# Altium PCB PCB_Console.PcbDoc
Units mm, origin at the board's own origin, x right, y up, seen from the top; angles counter-clockwise.
Board outline 188.35 x 103.18 mm, 2 copper layers (Top Layer, Bottom Layer), stack 1.071 mm thick; 117 components, 85 nets, 404 pads, 0 vias.
Unrouted connection lines stored in the file: 269.
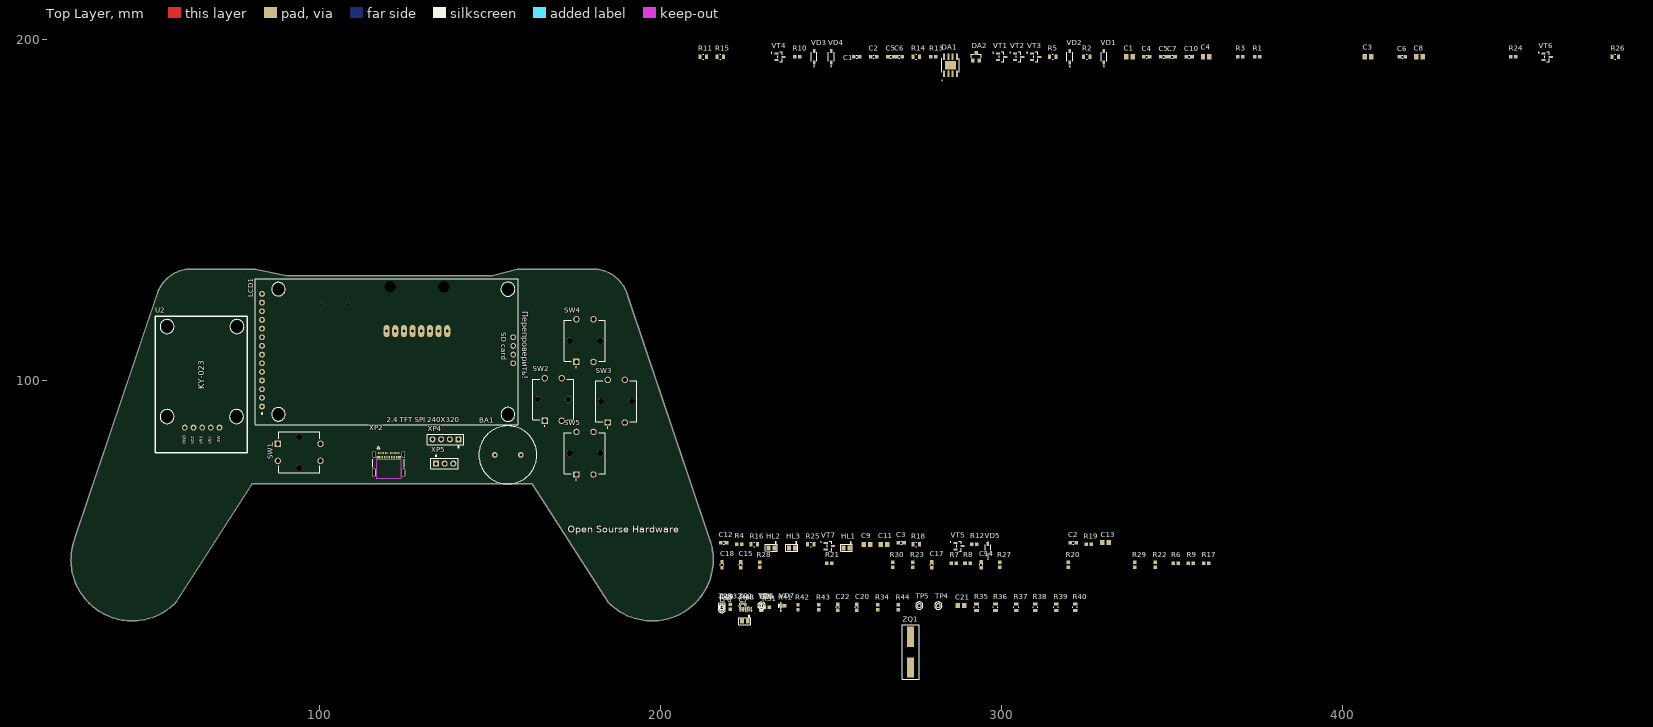
[diagram p0: Top Layer view]
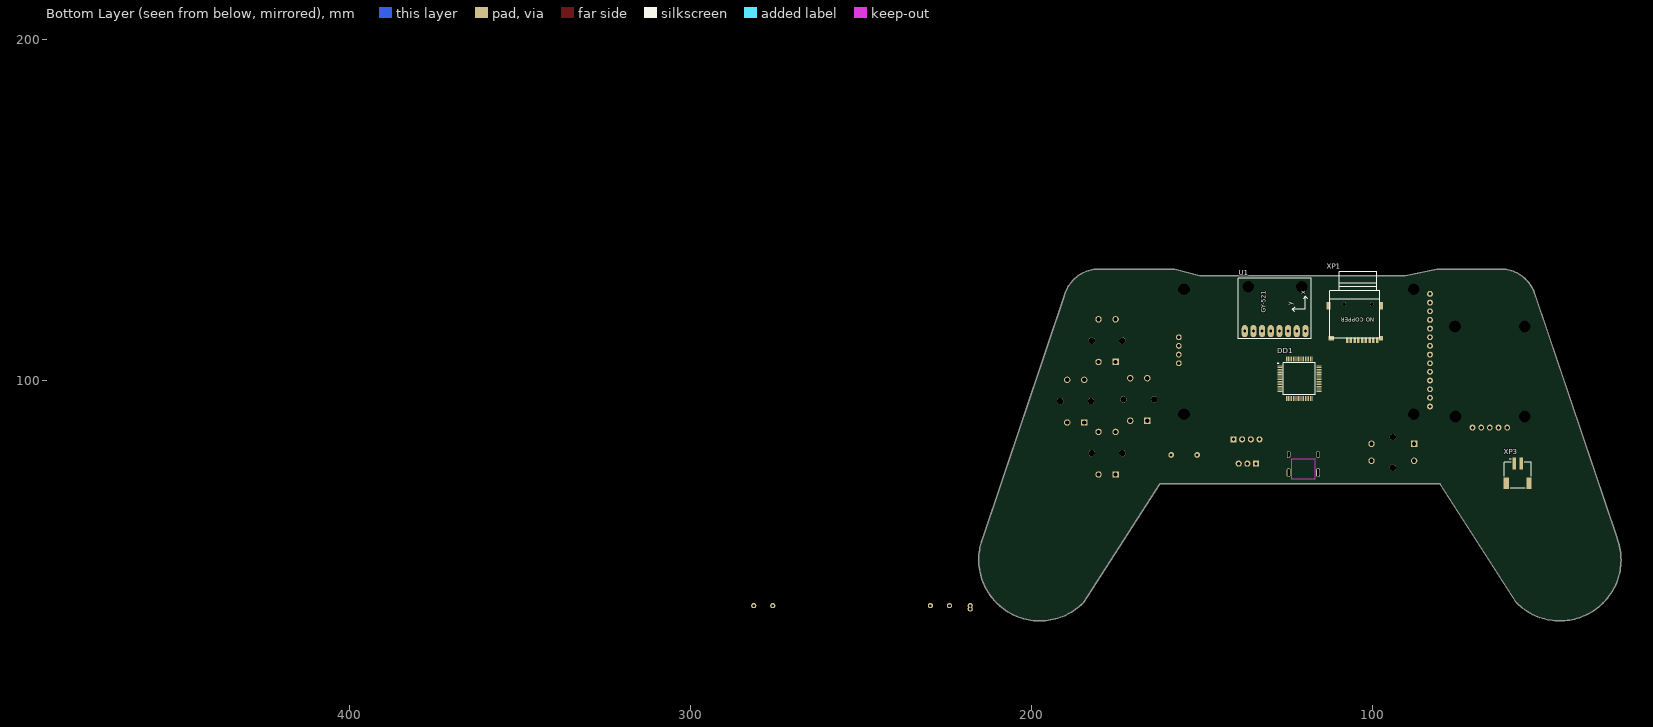
[diagram p1: Bottom Layer view, seen from below]

## Layer stack, top to bottom
Top Solder: solder mask 0.0102, Solder Resist, Dk 3.5
Top Layer: signal copper 0.0356
Dielectric 1: dielectric 1, FR-4, Dk 4.8
Bottom Layer: signal copper 0.0356
Bottom Solder: solder mask 0.0102, Solder Resist, Dk 3.5

## Board outline
57.711,34.865 80.137,69.75 162.363,69.75 184.789,34.865 ccw(c185,35) 184.823,34.823 ccw(c197.5,47.5) 215.428,47.5 ccw(c197.5,47.5) 214.288,53.791 190.344,124.822 ccw(c180.003,122.099) 181.075,132.739 ccw(c181,132.5) 181,132.75 158,132.75 ccw(c158,132.5) 157.934,132.742 150.633,130.75 90.368,130.75 81.052,132.74 ccw(c81,132.495) 81,132.745 61,132.745 ccw(c61,132.495) 60.811,132.659 ccw(c62.497,122.099) 52.156,124.822 28.212,53.791 ccw(c45,47.5) 57.677,34.823 ccw(c57.5,35)

## Design rules (kind name [scope] priority, off if disabled: settings)
Clearance [All] p1: gap=0.254 ignorepadtopadclearanceinfootprint=FALSE except(0: Arc-Hole Track-Hole SMDPad-Hole THPad-Hole Via-Hole Fill-Hole Poly-Hole Region-Hole Text-Hole)
Height [All] p1: minheight=0 maxheight=35 prefheight=12.7
PolygonConnect [All] p1: connectstyle=Relief reliefconductorwidth=0.254 reliefentries=4 polygonreliefangle="90 Angle" airgapwidth=0.254
RoutingVias [All] p1: holewidth=0.711 width=1.27 viastyle="Through Hole" minholewidth=0.711 minwidth=1.27 maxholewidth=0.711 maxwidth=1.27
SolderMaskExpansion [All] p1: expansion=0.102
Width [All] p1: maxlimit=0.254 minlimit=0.254 preferedwidth=0.254
29 further rules are at their usual default settings.

## Components (designator, comment, footprint, x,y, rotation, side; value= is the part's Value field where it differs from the comment)
BA1 "EMX-8T01P" EMX-8T01PCB 151.384,78.232 r0 top
C1 "1uF" CAPC2012X70 337.5,195 r0 top
C2 "0,1uF" CAPC1608X90 320.999,52.5 r0 top
C3 "0,1uF" CAPC1608X90 270.499,52.5 r0 top
C4 "0,1uF" CAPC1608X90 342.5,195 r0 top
C5 "0,1uF" CAPC1608X90 347.5,195 r0 top
C6 "0,1uF" CAPC1608X90 417.5,195 r0 top
C7 "0,1uF" CAPC1608X90 350,195 r0 top
C8 "1uF" CAPC2012X70 422.5,195 r0 top
C9 "20 pF" CAPC2012X70 260.499,52 r0 top
C10 "0,1uF" CAPC1608X90 355,195 r0 top
C11 "20 pF" CAPC2012X70 265.499,52 r0 top
C12 "0,1uF" CAPC1608X90 218.5,52.5 r0 top
C13 "1uF" CAPC2012X70 330.499,52.5 r0 top
C14 "0,1uF" CAPC1608X90 293.999,46 r90 top
C15 "0,1uF" CAPC1608X90 223.5,46 r90 top
C16 "0,1uF" CAPC1608X90 229.616,33.528 r90 top
C17 "0,1uF" CAPC1608X90 279.499,46 r90 top
C18 "0,1uF" CAPC1608X90 218,46 r90 top
C19 "0,1uF" CAPC1608X90 217.932,33.528 r90 top
C20 "0,1uF" CAPC1608X90 257.556,33.528 r90 top
C21 "1uF" CAPC2012X70 288.036,34.036 r0 top
C22 "0,1uF" CAPC1608X90 251.968,33.528 r90 top
DA1 "TP4056" SOP127P600X175-9N 285,192.5 r90 top
DA2 "XC6206P332MR-G" SOT-23 292.5,195 r0 top
DD1 "STM32F411RET6" QFP50P1200X1200X160-64N 121.412,100.584 r180 bottom
HL1 "FYLS-0805UBC" "0805 CHIP SMD LED" 254.499,51 r0 top
HL2 "FYLS-0805BUGC" "0805 CHIP SMD LED" 232.5,51 r0 top
HL3 "FYLS-0805URC" "0805 CHIP SMD LED" 238.5,51 r0 top
HL4 "FYLS-0805BUGC" "0805 Chip SMD LED" 224.677,29.464 r0 top
LCD1 "2.4' TFT SPI  ILI9341" "ILI9341 TFT DISPLAY" 83.09,125.45 r270 top locked
R1 "5.1К" RESC1607X60N 375,195 r0 top
R2 "0.51" 0805_RES 325,195 r0 top
R3 "5.1К" RESC1607X60N 370,195 r0 top
R4 "5.1К" RESC1607X60N 223,52 r0 top
R5 "0.51" 0805_RES 315,195 r0 top
R6 "1K" RESC1607X60N 350.999,46.5 r0 top
R7 "1K" RESC1607X60N 285.999,46.5 r0 top
R8 "1K" RESC1607X60N 289.999,46.5 r0 top
R9 "1K" RESC1607X60N 355.499,46.5 r0 top
R10 "5.1К" RESC1607X60N 240,195 r0 top
R11 "47 K" 0805_RES 212.5,195 r0 top
R12 "22" RESC1607X60N 291.999,52 r0 top
R13 "22" RESC1607X60N 280,195 r0 top
R14 "47 K" 0805_RES 275,195 r0 top
R15 "47 K" 0805_RES 217.5,195 r0 top
R16 "47 K" 0805_RES 227.5,52 r0 top
R17 "1K" RESC1607X60N 359.999,46.5 r0 top
R18 "47 K" 0805_RES 274.999,52 r0 top
R19 "22" RESC1607X60N 325.499,52 r0 top
R20 "1K" RESC1607X60N 319.499,46 r90 top
R21 "1K" RESC1607X60N 249.5,46.5 r0 top
R22 "5.1К" RESC1607X60N 344.999,46 r90 top
R23 "5.1К" RESC1607X60N 273.999,46 r90 top
R24 "5.1К" RESC1607X60N 450,195 r0 top
R25 "47 K" 0805_RES 244,52 r0 top
R26 "0.51" 0805_RES 480,195 r0 top
R27 "1K" RESC1607X60N 299.499,46 r90 top
R28 "1K" RESC1607X60N 229,46 r90 top
R29 "5.1К" RESC1607X60N 338.999,46 r90 top
R30 "5.1К" RESC1607X60N 267.999,46 r90 top
R31 "22" RESC1607X60N 231.14,33.528 r0 top
R32 "22" RESC1607X60N 220.472,33.755 r90 top
R33 "1K" RESC1607X60N 224.028,33.528 r90 top
R34 "1K" RESC1607X60N 263.652,33.528 r90 top
R35 "47 K" 0805_res 292.608,33.528 r90 top
R36 "47 K" 0805_res 298.196,33.528 r90 top
R37 "47 K" 0805_res 304.292,33.528 r90 top
R38 "47 K" 0805_res 309.88,33.528 r90 top
R39 "47 K" 0805_res 315.976,33.528 r90 top
R40 "47 K" 0805_res 321.564,33.528 r90 top
R41 "5.1К" RESC1607X60N 235.712,34.036 r0 top
R42 "5.1К" RESC1607X60N 240.284,33.528 r90 top
R43 "5.1К" RESC1607X60N 246.38,33.528 r90 top
R44 "1K" RESC1607X60N 269.748,33.528 r90 top
R45 "5.1К" RESC1607X60N 217.932,33.528 r90 top
R46 "5.1К" RESC1607X60N 224.028,33.528 r90 top
SW1 "B3F-4055" SW_B3F-4055 94,79 r0 top locked
SW2 "B3F-4055" SW_B3F-4055 168.5,94.5 r90 top
SW3 "B3F-4055" SW_B3F-4055 187,94 r90 top
SW4 "B3F-4055" SW_B3F-4055 177.8,111.76 r90 top
SW5 "B3F-4055" SW_B3F-4055 177.8,78.74 r90 top
TP1 "BAT" "Test Point" 229.616,34.036 r0 top
TP2 "SYS" "Test Point" 224.028,34.036 r0 top
TP3 "3.3V" "Test Point" 217.932,34.036 r0 top
TP4 "PWM_A" "Test Point" 281.432,34.036 r0 top
TP5 "PWM_L" "Test Point" 275.844,34.036 r0 top
TP6 "RST" "Test Point" 217.932,33.02 r0 top
U1 "GY-521" GY-521 128.524,123.444 r90 bottom
U2 "KY-023" KY-023_PCB 78.75,78.897 r90 top locked
VD1 "1N4007L" SOD3715X135N 330,195 r90 top
VD2 "1N4007L" SOD3715X135N 320,195 r90 top
VD3 "1N4007L" SOD3715X135N 245,195 r90 top
VD4 "1N4007L" SOD3715X135N 250,195 r90 top
VD5 "1N4007L" SOD3715X135N 295.999,50.5 r90 top
VD6 "ESD3V3D5" SOD-523_PCB 229.108,34.036 r90 top
VD7 "ESD3V3D5" SOD-523_PCB 235.204,34.036 r90 top
VT1 "SI2301B" SOT95P240X111-3N 300,195 r0 top
VT2 "SI2301B" SOT95P240X111-3N 305,195 r0 top
VT3 "SI2301B" SOT95P240X111-3N 310,195 r0 top
VT4 "AO3400" SOT95P240X111-3N 235,195 r0 top
VT5 "AO3400" SOT95P240X111-3N 287.499,51.5 r0 top
VT6 "SI2301B" SOT95P240X111-3N 460,195 r0 top
VT7 "AO3400" SOT95P240X111-3N 249.5,51.5 r0 top
XP1 "112J-TDAR-R01" 112J-TDAR-R01 100.204,122.428 r0 bottom
XP2 "1054500101" MOLEX_1054500101 120.25,71.26 r0 top locked
XP3 "S2B-PH-SM4-TB(LF)(SN)" JST_S2B-PH-SM4-TB(LF)(SN) 57.388,75.692 r180 bottom
XP4 "PLS-4" PLS-4_PCB 140.716,82.804 r180 top
XP5 "PLS-3" PLS-3_PCB 134.112,75.692 r0 top
ZQ1 "8 MHz" HC-49SM_PCB 273.304,15.892 r90 top
С1 "10uF" CAPC1608X90 257.5,195 r0 top
С2 "10uF" CAPC1608X90 262.5,195 r0 top
С3 "4.7 uF" CAPC2012X70 407.5,195 r0 top
С4 "4,7 uF" CAPC2012X70 360,195 r0 top
С5 "10uF" CAPC1608X90 267.5,195 r0 top
С6 "10uF" CAPC1608X90 270,195 r0 top
С7 "4,7 uF" CAPC2012X70 224.536,33.02 r0 top

## Footprints (in the part's own frame and the unit in brackets; to place one, negate y for a bottom-side part, rotate by r counter-clockwise, add the part's x,y. Pads: shape width x height; smd on the part's side, far side on the other; paste and mask are expansions set on the pad)
112J-TDAR-R01 [mm]
  rect 0.7x1.6 smd: 1(7.2,10.5) 2(6.1,10.5) 3(5,10.5) 4(3.9,10.5) 5(2.8,10.5) 6(1.7,10.5) 7(0.6,10.5) 8(-0.5,10.5) CD(-1.6,10.5)
  rect 1.2x1.4 smd: G(-2.8,10)
  rect 1.6x1.4 smd: P$10(11.8,10)
  rect 1.2x2.2 smd: P$11(-2.8,0.4) P$12(12.7,0.4)
  round 1 hole 1 unplated: ""(0,0) ""(8,0)
  silkscreen extent -2.4,-9.5 12.3,10
"0805 CHIP SMD LED" [mm]
  rect 1.16x1.47 smd: A(-0.875,0) C(0.875,0)
  silkscreen extent -1.75,-1 1.75,1.72, body extent -1,-0.62 1,0.63, height 0.8
"0805 Chip SMD LED" [mm]
  rect 1.16x1.47 smd: A(-0.875,0) C(0.875,0)
  silkscreen extent -1.75,-1 1.75,1.72, body extent -1,-0.62 1,0.63, height 0.8
0805_RES [mm]
  rect 0.92x1.38 smd: 1(-0.955,0) 2(0.955,0)
  silkscreen extent -0.17,-0.68 0.17,0.68, body extent -1,-0.62 1,0.63, height 0.6
0805_res [mm]
  rect 0.92x1.38 smd: 1(-0.955,0) 2(0.955,0)
  silkscreen extent -0.17,-0.68 0.17,0.68, body extent -1,-0.62 1,0.63, height 0.6
CAPC1608X90 [mm]
  rect 1.1x1 smd: 1(-0.85,0) 2(0.85,0)
  silkscreen extent -0.15,-0.45 0.15,0.45, body extent -0.8,-0.4 0.8,0.4, height 0.9
CAPC2012X70 [mm]
  rect 1.3x1.5 smd: 1(-0.95,0) 2(0.95,0)
  body extent -1,-0.62 1,0.63, height 1.45
EMX-8T01PCB [mm]
  round 1.7 hole 0.9: 1(0,0) 2(7.62,0)
  silkscreen extent -4.69,-8.5 12.31,8.5, body extent -4.19,-8 11.81,8, height 14.5
GY-521 [mil]
  round 60 hole 133.86: 10(160,-310) 10(160,310)
  oval 140x70 hole 31.5: ADO(-350,-250) GND(-350,250) INT(-350,-350) SCL(-350,150) SDA(-350,50) VCC(-350,350) XCL(-350,-150) XDA(-350,-50)
  silkscreen extent -440,-420 260,425, body extent -385,-404 245,404, height 138
HC-49SM_PCB [mm]
  rect 6x2 smd: 1(0,0) 2(9,0)
  silkscreen extent -3.5,-2.5 12.5,2.5, body extent -2,-2.35 11,2.35, height 4.01
"ILI9341 TFT DISPLAY" [mm]
  round 1.524 hole 3.4: 0(-1.397,72.136) 0(-1.397,4.826) 0(35.306,72.136) 0(35.306,4.826)
  round 1.7 hole 1: 1(33.02,0) 2(30.48,0) 3(27.94,0) 4(25.4,0) 5(22.86,0) 6(20.32,0) 7(17.78,0) 8(15.24,0) 9(12.7,0) 10(10.16,0) 11(7.62,0) 12(5.08,0) 13(2.54,0) 14(0,0) 15(12.7,73.66) 16(15.24,73.66) 17(17.78,73.66) 18(20.32,73.66)
  silkscreen extent -4.45,-2.03 38.35,75.18, body extent -4.06,8.64 38.1,68.58, height 6
JST_S2B-PH-SM4-TB(LF)(SN) [mm]
  rect 1x3.5 smd: 1(-1,0) 2(1,0)
  rect 1.5x3.4 smd: S1(-3.35,-5.75) S2(3.35,-5.75)
  silkscreen extent -3.95,-7.25 3.95,1.45, body extent -3.96,-7.35 3.94,1.25, height 5.5
KY-023_PCB [mm]
  round 1.524 hole 3.4: 0(10.603,23.5) 0(10.603,3.136) 0(37,3) 0(37,23.5)
  round 1.7 hole 1: 1(7.366,18.288) 2(7.366,15.748) 3(7.366,13.208) 4(7.366,10.668) 5(7.366,8.128)
  silkscreen extent 0,0 40,27, body extent 0.1,0 39.9,27.26, height 33.2
MOLEX_1054500101 [mm]
  rect 0.298x0.7 smd mask+0.064: A1(-3,7.54) A2(-2.5,7.54) A3(-2,7.54) A4(-1.5,7.54) A5(-1,7.54) A6(-0.5,7.54) A7(0.5,7.54) A8(1,7.54) A9(1.5,7.54) A10(2,7.54) A11(2.5,7.54) A12(3,7.54) B2(2.25,6.24) B3(1.75,6.24) B4(1.25,6.24) B5(0.75,6.24) B6(0.25,6.24) B7(-0.25,6.24) B8(-0.75,6.24) B9(-1.25,6.24) B10(-1.75,6.24) B11(-2.25,6.24)
  rect 0.998x0.7 smd mask+0.064: B1(3.1,6.24) B12(-3.1,6.24)
  oval 1.036x2.1 hole 0.6 slot 1.6 at 90 deg mask+0.064: SH1(-4.32,7.13) SH2(4.32,7.13)
  oval 1.1x2.6 hole 0.6 slot 2.1 at 90 deg mask+0.064: SH3(-4.32,1.77) SH4(4.32,1.77)
  Keep-Out Layer region: 3.5,0 -3.5,0 -3.5,5.65 3.5,5.65
  silkscreen extent -4.62,3.42 4.62,9.45, body extent -4.44,-0.14 4.49,7.76, height 3.2
PLS-3_PCB [mm]
  rect 1.8x1.8 hole 1: 1(0,0)
  round 1.8 hole 1: 2(2.54,0) 3(5.08,0)
  silkscreen extent -1.52,-1.52 6.6,2.49, body extent -1.27,-1.27 6.35,1.27, height 8.6
PLS-4_PCB [mm]
  rect 1.8x1.8 hole 1: 1(0,0)
  round 1.8 hole 1: 2(2.54,0) 3(5.08,0) 4(7.62,0)
  silkscreen extent -1.52,-1.52 9.14,2.49, body extent -1.27,-1.27 8.89,1.27, height 8.6
QFP50P1200X1200X160-64N [mm]
  rect 1.475x0.3 smd: 1(-5.738,3.75) 2(-5.738,3.25) 3(-5.738,2.75) 4(-5.738,2.25) 5(-5.738,1.75) 6(-5.738,1.25) 7(-5.738,0.75) 8(-5.738,0.25) 9(-5.738,-0.25) 10(-5.738,-0.75) 11(-5.738,-1.25) 12(-5.738,-1.75) 13(-5.738,-2.25) 14(-5.738,-2.75) 15(-5.738,-3.25) 16(-5.738,-3.75) 33(5.738,-3.75) 34(5.738,-3.25) 35(5.738,-2.75) 36(5.738,-2.25) 37(5.738,-1.75) 38(5.738,-1.25) 39(5.738,-0.75) 40(5.738,-0.25) 41(5.738,0.25) 42(5.738,0.75) 43(5.738,1.25) 44(5.738,1.75) 45(5.738,2.25) 46(5.738,2.75) 47(5.738,3.25) 48(5.738,3.75)
  rect 0.3x1.475 smd: 17(-3.75,-5.738) 18(-3.25,-5.738) 19(-2.75,-5.738) 20(-2.25,-5.738) 21(-1.75,-5.738) 22(-1.25,-5.738) 23(-0.75,-5.738) 24(-0.25,-5.738) 25(0.25,-5.738) 26(0.75,-5.738) 27(1.25,-5.738) 28(1.75,-5.738) 29(2.25,-5.738) 30(2.75,-5.738) 31(3.25,-5.738) 32(3.75,-5.738) 49(3.75,5.738) 50(3.25,5.738) 51(2.75,5.738) 52(2.25,5.738) 53(1.75,5.738) 54(1.25,5.738) 55(0.75,5.738) 56(0.25,5.738) 57(-0.25,5.738) 58(-0.75,5.738) 59(-1.25,5.738) 60(-1.75,5.738) 61(-2.25,5.738) 62(-2.75,5.738) 63(-3.25,5.738) 64(-3.75,5.738)
  silkscreen extent -6.35,-4.65 4.65,4.65, body extent -6,-6 6,6, height 1.6
RESC1607X60N [mm]
  rect 1.04x1.02 smd: 1(-0.735,0) 2(0.735,0)
  body extent -0.8,-0.4 0.8,1.02, height 0.55
SOD3715X135N [mm]
  rrect18% 1.21x0.73 smd: A(1.68,0) C(-1.68,0)
  silkscreen extent -2.9,-0.85 1.35,0.85, body extent -1.82,-0.79 1.82,0.76, height 1.38
SOD-523_PCB [mm]
  rect 0.56x0.4 smd: A(0.785,0) C(-0.785,0)
  silkscreen extent -1.62,-0.52 0.6,0.52, body extent -0.8,-0.4 0.8,0.4, height 0.65
SOP127P600X175-9N [mm]
  rrect25% 1.97x0.6 smd: 1(-2.475,1.905) 2(-2.475,0.635) 3(-2.475,-0.635) 4(-2.475,-1.905) 5(2.475,-1.905) 6(2.475,-0.635) 7(2.475,0.635) 8(2.475,1.905)
  rect 2.413x3.302 smd paste-3: 9(0,0)
  silkscreen extent -4.54,-2.55 2,2.6, body extent -3,-2.45 3,2.45, height 1.75
SOT95P240X111-3N [mm]
  rrect25% 1.23x0.6 smd: 1(-1.06,0.95) 2(-1.06,-0.95) 3(1.06,0)
  silkscreen extent -2.6,-1.46 0.65,1.46, body extent -1.2,-1.45 1.2,1.45, height 1.11
SOT-23 [mm]
  rect 1.016x1.2 smd: 1(-0.95,-1.06) 2(0.95,-1.06) 3(0,1.06)
  silkscreen extent -1.46,-0.25 1.46,0.8, body extent -1.4,-1.45 1.4,1.45, height 1.3
SW_B3F-4055 [mm]
  rect 1.875x1.875 hole 1.25: 1(-6.25,2.5)
  round 1.875 hole 1.25: 2(6.25,2.5) 3(-6.25,-2.5) 4(6.25,-2.5)
  round 1.85 hole 1.85 unplated: ""(0,-4.5) ""(0,4.5)
  silkscreen extent -7.9,-6 6,6, body extent -6.88,-6 6.88,6, height 7.5
"Test Point" [mil]
  round 60 hole 31.5: 1(0,0)
  silkscreen extent -43,-42 43,42

## Part data
BA1: "EMX-8T01P, 80дБ/2050Гц/1,5B/16мм", MP=EMX-8T01P
C1 C8 C13 C21: library part CC0805KKX7R8BB105, "CC0805KKX7R8BB105, Керамический ЧИП-конденсатор 0805 X7R 1мкФ ±10% 25В", Package="0805 Yageo", Check_prices=https://www.snapeda.com/parts/CC0805KKX7R8BB105/Yageo/view-part/105544/?ref=eda, Digi-Key_Part_Number=311-1456-1-ND, MF=Yageo, MP=CC0805KKX7R8BB105, Purchase-URL=https://pricing.snapeda.com/search/part/CC0805KKX7R8BB105/?ref=eda, SnapEDA_Link=https://www.snapeda.com/parts/CC0805KKX7R8BB105/Yageo/view-part/105544/?ref=snap
C2 C3 C4 C5 C6 C7 C10 C12 C14 C15 C16 C17 C18 C19 C20 C22: library part CC0603KRX7R9BB104, "CC0603KRX7R9BB104, Керамический ЧИП-конденсатор 0603 X7R 0.1мкФ ±10% 50В", Package="0603 Yageo", Check_prices=https://www.snapeda.com/parts/CC0603KRX7R9BB104/Yageo/view-part/?ref=eda, Digi-Key_Part_Number=311-1344-2-ND, MF=Yageo, MP=CC0603KRX7R9BB104, Purchase-URL=https://pricing.snapeda.com/search/part/CC0603KRX7R9BB104/?ref=eda, SnapEDA_Link=https://www.snapeda.com/parts/CC0603KRX7R9BB104/Yageo/view-part/?ref=snap
C9 C11: library part CC0805JRNPO9BN200, "Керамический ЧИП-конденсатор 0805 NP0 20пФ ±5% 50В", MP=CC0805JRNPO9BN200
DA1: "Complete single cell Li-Ion battery with a constant current / constant voltage linear charger", Package=Package, Availability="Not in stock", Check_prices=https://www.snapeda.com/parts/TP4056/NanJing+Top+Power+ASIC+Corp./view-part/?ref=eda, MF="NanJing Top Power ASIC Corp.", MP=TP4056, Price=None, SnapEDA_Link=https://www.snapeda.com/parts/TP4056/NanJing+Top+Power+ASIC+Corp./view-part/?ref=snap
DA2: "Linear Voltage Regulator IC Positive Fixed 1 Output 200mA SOT-23", Package="SOT-23-3 Torex", Availability="In Stock", Check_prices=https://www.snapeda.com/parts/XC6206P332MR-G/Torex/view-part/?ref=eda, MF=Torex, MP=XC6206P332MR-G, Price=None, Purchase-URL=https://pricing.snapeda.com/search/part/XC6206P332MR-G/?ref=eda, SnapEDA_Link=https://www.snapeda.com/parts/XC6206P332MR-G/Torex/view-part/?ref=snap
DD1: "32-Bit MCU+DSP 512K Flash 100MHz LQFP64 STMicroelectronics STM32F411RET6, 32bit ARM Cortex M4 MCU, 100MHz, 512 kB Flash, 64-Pin LQFP", Manufacturer_Name=STMicroelectronics, Mouser Part Number=511-STM32F411RET6, Arrow Part Number=STM32F411RET6, Arrow Price/Stock=https://www.arrow.com/en/products/stm32f411ret6/stmicroelectronics?region=europe, Datasheet Link=http://www.farnell.com/datasheets/2042639.pdf, Geometry.Height=1.6mm, Manufacturer_Part_Number=STM32F411RET6, Mouser Price/Stock=https://www.mouser.co.uk/ProductDetail/STMicroelectronics/STM32F411RET6?qs=pjMTYa9MTGWrHTmziD2M%2Fg%3D%3D
HL1: "FYLS-0805UBC, Светодиод smd 2х1,25мм/синий/468нм/120мкд/прозрачный/130°", MP=FYLS-0805UBC, Price=None
HL2 HL4: "FYLS-0805BUGC, Светодиод smd 2х1,25мм/зеленый/570нм/40мкд/прозрачный/130°", MP=FYLS-0805URC, Price=None
HL3: "FYLS-0805URC, Светодиод smd 2х1,25мм/красный/631нм/80мкд/прозрачный/130°", MP=FYLS-0805URC, Price=None
R1 R3 R4 R10 R22 R23 R24 R29 R30 R41 R42 R43 R45 R46: library part RC0603FR-075K1L, "RC0603FR-075K1L, Толстопленочный ЧИП-резистор 0603 5.1кОм ±1% 0.1Вт -55°С...+155°С", Package="0603 Yageo", Digi-Key_Part_Number=311-5.10KHRCT-ND, MF=Yageo, MP=RC0603FR-075K1L, Purchase-URL=https://pricing.snapeda.com/search/part/RC0603FR-075K1L/?ref=eda, SnapEDA_Link=https://www.snapeda.com/parts/RC0603FR-075K1L/Yageo/view-part/106091/?ref=snap
R2 R5 R26: library part RL0805FR-070R51L, "Толстопленочный ЧИП-резистор 0805 0.51Ом ±1% 0.125Вт -55°С...+125°С", Package=None, Availability=Unavailable, MP=RL0805FR-070R51L, Price=None
R6 R7 R8 R9 R17 R20 R21 R27 R28 R33 R34 R44: library part RC0603JR-071KL, "RC0603JR-071KL, Толстопленочный ЧИП-резистор 0603 1кОм ±5% 0.1Вт -55°С...+155°С", MP=RC0603JR-071KL
R11 R14 R15 R16 R18 R25 R35 R36 R37 R38 R39 R40: library part RC0805FR-0747KL, "RC0805FR-0747KL, Толстопленочный ЧИП-резистор 0805 47кОм ±1% 0.125Вт -55°С...+155°С", Package=None, Availability=Unavailable, MP=RC0805FR-0747KL, Price=None
R12 R13 R19 R31 R32: library part RC0603FR-0722RL, "RC0603FR-0722RL, Толстопленочный ЧИП-резистор 0603 22Ом ±1% 0.1Вт -55°С...+155°С", MP=RC0603FR-0722RL
SW1 SW2 SW3 SW4 SW5: Package=None, Availability=Unavailable, MP=B3F-4055, Price=None
TP1 TP2 TP3 TP4 TP5 TP6: library part "Test Point", "Test point 0.8 ММ"
U1: "Triple Axis Accelerometer Gyro Breakout", Package=Package, Availability="Not in stock", Check_prices=https://www.snapeda.com/parts/GY-521/GODREAM+FORDREAM+CO.%252C+LIMITED/view-part/?ref=eda, MF="GODREAM FORDREAM CO., LIMITED", MP=GY-521, Price=None, SnapEDA_Link=https://www.snapeda.com/parts/GY-521/GODREAM+FORDREAM+CO.%252C+LIMITED/view-part/?ref=snap
U2: "Двухосевой джойстик KY-023", MP=KY-023
VD1 VD2 VD3 VD4 VD5: "1N4007L, Диод общего применения 1кВ 1A SOD-123", Package="SOD-123 Diodes Inc.", Availability=Unavailable, MF="Diodes Inc.", MP=1N4148W-13-F, Price=None, SnapEDA_Link=https://www.snapeda.com/parts/1N4148W-13-F/Diodes%20Inc./view-part/9226/?ref=snap
VD6 VD7: "TVS диод защитный однонаправленный 5В SOD523", MP=ESD3V3D5
VT1 VT2 VT3 VT6: "SI2301B, Транзистор полевой MOSFET P-канальный 20В 2.5A 120мОм", Package=None, Availability=Unavailable, MP=altium_native_batch, Price=None
VT4 VT5 VT7: "Транзистор полевой N-канальный 30В 5.8А 0.9Вт", Package=None, Availability=Unavailable, MP=altium_native_batch, Price=None
XP1: "MicroSD сокет вставной", Package=None, Availability="In Stock", Check_prices=https://www.snapeda.com/parts/112J-TDAR-R01/Attend/view-part/?ref=eda, MF=Attend, MP=112J-TDAR-R01, Price=None, SnapEDA_Link=https://www.snapeda.com/parts/112J-TDAR-R01/Attend/view-part/?ref=snap
XP2: "USB-C (USB TYPE-C) USB 3.2 Gen 2 (USB 3.1 Gen 2, Superspeed + (USB 3.1)) Receptacle Connector 24 Position Surface Mount, Right Angle; Through Hole", Package=None, Check_prices=https://www.snapeda.com/parts/1054500101/Molex/view-part/?ref=eda, MF=Molex, MP=1054500101, SnapEDA_Link=https://www.snapeda.com/parts/1054500101/Molex/view-part/?ref=snap
XP3: "Connector Header Surface Mount, Right Angle 2 position 0.079 (2.00mm)", Package=None, Check_prices=https://www.snapeda.com/parts/S2B-PH-SM4-TB(LF)(SN)/JST+Sales+America+Inc./view-part/?ref=eda, Digi-Key_Part_Number=455-1749-2-ND, MF="JST Sales", MP=S2B-PH-SM4-TB(LF)(SN), Purchase-URL=https://pricing.snapeda.com/search/part/S2B-PH-SM4-TB(LF)(SN)/?ref=eda, SnapEDA_Link=https://www.snapeda.com/parts/S2B-PH-SM4-TB(LF)(SN)/JST+Sales+America+Inc./view-part/?ref=snap
ZQ1: library part "HC-49SM 8.000 МГц", "8.000 МГц HC-49SM, Кварцевый резонатор", MP="HC-49SM 8.000 МГц"
С1 С2 С5 С6: library part CC0603MRX5R8BB106, "Керамический ЧИП-конденсатор 0603 X5R 10мкФ ±20% 25В", =https://www.promelec.ru/product/341443/
С3 С4 С7: library part CL21A475KAQNNNE, "Керамический ЧИП-конденсатор 0805 X5R 4.7мкФ ±10% 25В", MP=CL21A475KAQNNNE
LCD1: MP="2.4' TFT SPI  ILI9341"
XP4: MP=PLS-4
XP5: MP=PLS-3

## Nets (pads, with @x,y where several pads share a name; then routed paths per layer and width w, separated by ;. In a path a pad name is that pad's centre, name@x,y a point inside that pad or via, vN(x,y) a via of type N, cw(c..) or ccw(c..) an arc to the next point about the centre after c; other vN are vias at no path point)
+3.3V: C2.2 C4.2 C5.2 C6.2 C7.2 C8.2 C10.2 C13.2 C21.2 DA2.2 DD1.1 DD1.13 DD1.19 DD1.32 DD1.48 DD1.64 LCD1.14 R22.2 R23.2 R29.2 R30.2 R31.2 R38.2 TP3.1 U2.2 XP1.4 XP4.4 С4.2 С6.2 С7.2
+SYS: C3.2 DA2.3 R16.2 R24.2 R41.1 TP2.1 U1.VCC VT3.3 VT6.2 С5.2
BAT: DA1.5 TP1.1 VT1.3 XP3.1 С2.2
BAT_VOLT: C22.2 DD1.20 R41.2 R42.2
BUT_DOWN: C18.2 DD1.57 R28.1
BUT_LEFT: C14.2 DD1.26 R20.1
BUT_RIGHT: C15.2 DD1.27 R21.1
BUT_UP: C17.2 DD1.28 R27.1
GND: C2.1 C3.1 C4.1 C5.1 C6.1 C7.1 C8.1 C9.1 C10.1 C11.1 C12.1 C13.1 C14.1 C15.1 C16.1 C17.1 C18.1 C19.1 C20.1 C21.1 C22.1 DA1.1 DA1.3 DA1.9 DA2.1 DD1.12 DD1.18 DD1.31 DD1.47 DD1.63 HL1.C HL4.C LCD1.13 R1.2 R2.1 R3.2 R4.1 R9.2 R11.1 R15.1 R18.1 R25.1 R43.1 R46.1 SW1.1 SW1.2 SW2.3 SW2.4 SW3.3 SW3.4 SW4.3 SW4.4 SW5.3 SW5.4 U1.GND U2.1 VD1.A VD6.A VD7.A VT4.2 VT5.2 VT7.2 XP1.6 XP1.G XP2.A1 XP2.A12 XP2.B1 XP2.B12 XP2.SH1 XP2.SH2 XP2.SH3 XP2.SH4 XP3.2 XP3.S1 XP3.S2 XP4.1 XP5.3 С1.1 С2.1 С3.2 С4.1 С5.1 С6.1 С7.1
GY_INT: DD1.62 U1.INT
GY_SCL: DD1.58 U1.SCL
GY_SDA: DD1.59 U1.SDA
JOYST_BUT: C20.2 DD1.61 R34.1
JOYST_X: DD1.14 U2.3
JOYST_Y: DD1.15 U2.4
LCD_CS: DD1.42 LCD1.12
LCD_DC/RS: DD1.23 LCD1.10
LCD_MISO: DD1.10 LCD1.6
LCD_MOSI: DD1.11 LCD1.9
LCD_RST: DD1.43 LCD1.11
LCD_SCK: DD1.29 LCD1.8
NetBA1_1: BA1.1 R31.1 VD5.C
NetBA1_2: BA1.2 VD5.A VT5.3
NetC1_1: C1.1 R2.2
NetC9_2: C9.2 DD1.6 ZQ1.1
NetC11_2: C11.2 DD1.5 ZQ1.2
NetC19_2: C19.2 DD1.7 TP6.1
NetDA1_2: DA1.2 R4.2
NetDA1_4: DA1.4 DA1.8 R5.1 С1.2
NetDA1_6: DA1.6 HL2.C
NetDA1_7: DA1.7 HL3.C
NetDD1_21: DD1.21 R6.2
NetDD1_30: DD1.30 С3.1
NetDD1_60: DD1.60 R9.1
NetHL1_A: HL1.A R6.1
NetHL2_A: HL2.A R7.1
NetHL3_A: HL3.A R8.1
NetHL4_A: HL4.A R33.1
NetLCD1_7: LCD1.7 R26.2
NetR1_1: R1.1 XP2.A5
NetR3_1: R3.1 XP2.B5
NetR10_2: R10.2 VT1.1 VT2.1
NetR12_2: R12.2 VD7.C XP5.1
NetR13_2: R13.2 VD6.C XP5.2
NetR14_1: R14.1 VD3.A VT3.1 VT4.3
NetR14_2: R14.2 VD2.C VT2.3 VT3.2
NetR17_1: R17.1 R18.2 TP4.1 VT5.1
NetR20_2: R20.2 R22.1 SW2.1 SW2.2
NetR21_2: R21.2 R23.1 SW3.1 SW3.2
NetR24_1: R24.1 VT6.1 VT7.3
NetR25_2: R25.2 R44.1 TP5.1 VT7.1
NetR26_1: R26.1 VT6.3
NetR27_2: R27.2 R29.1 SW4.1 SW4.2
NetR28_2: R28.2 R30.1 SW5.1 SW5.2
NetR34_2: R34.2 U2.5
NetR35_2: R35.2 R36.2 R37.2 R39.2 R40.2
NetR42_1: R42.1 R43.2
NetSW1_3: SW1.3 SW1.4 VD3.C VD4.C
NetVT1_2: VT1.2 VT2.2
PWM_AUDIO: DD1.37 R17.2
PWM_LIGHT: DD1.41 R44.2
PWR_BUT: C12.2 DD1.35 R16.1 VD4.A
PWR_ENABLE: DD1.8 R15.2 VT4.1
SD_DET: DD1.38 R40.1 XP1.CD
SDIO_CLK: DD1.36 XP1.5
SDIO_CMD: DD1.22 XP1.3
SDIO_D0: DD1.39 XP1.7
SDIO_D1: DD1.40 R35.1 R36.1 R37.1 R38.1 R39.1 XP1.8
SDIO_D2: DD1.51 XP1.1
SDIO_D3: DD1.52 XP1.2
SWCLK: DD1.49 XP4.2
SWDIO: DD1.46 XP4.3
TCH_CS: DD1.54 LCD1.4
TCH_IRQ: DD1.34 LCD1.1
TCH_MISO: DD1.56 LCD1.2
TCH_MOSI: DD1.53 LCD1.3
TCH_SCK: DD1.33 LCD1.5
UART_RX: DD1.17 R12.1
UART_TX: DD1.16 R13.1 R33.2
USB_D+: R19.1 XP2.A6 XP2.B6
USB_D-: R32.1 XP2.A7 XP2.B7
USB_PRT_D+: DD1.45 R19.2
USB_PRT_D-: DD1.44 R32.2
VCC: C1.2 R5.2 R7.2 R8.2 R10.1 R11.2 R45.1 VD1.C VD2.A XP2.A4 XP2.A9 XP2.B4 XP2.B9
VCC_VOLTAGE: C16.2 DD1.9 R45.2 R46.2
pads on no net: DD1.2 DD1.3 DD1.4 DD1.24 DD1.25 DD1.50 DD1.55 LCD1.0 LCD1.15 LCD1.16 LCD1.17 LCD1.18 SW1. SW2. SW3. SW4. SW5. U1.10 U1.ADO U1.XCL U1.XDA U2.0 XP1. XP1.P$10 XP1.P$11 XP1.P$12 XP2.A2 XP2.A3 XP2.A8 XP2.A10 XP2.A11 XP2.B2 XP2.B3 XP2.B8 XP2.B10 XP2.B11

## Silkscreen, mask and mechanical layers (free items; w line width, h text height)
Top Overlay:
  text "Open Sourse Hardware" at 172.72,55.372 h2
Mechanical 1:
  lines w0.5: 61,132.495 81,132.495 90.342,130.5 150.667,130.5 158,132.5 181,132.5 ; 61.501,132.495 ccw(c62.497,122.099) 52.396,124.75 28.448,53.707 ccw(c45,47.5) 57.5,35 80,70 162.5,70 185,35 ccw(c197.5,47.5) 214.052,53.707 190.104,124.75 ccw(c180.003,122.099) 180.999,132.495

## Text inside footprints (layer, text, board x,y; h text height)
LCD1: Top Overlay "2.4 TFT SPI 240X320" at 119.666,87.858 h1.52; Top Overlay "SD card" at 153.194,114.274 h1.52 r270; Top Overlay "Перепроверить!" at 158.782,120.37 h3 r270
U1: Bottom Overlay "x" at 119.634,125.349 h1.27 r270; Bottom Overlay "y" at 123.444,122.174 h1.27 r270
U2: Top Overlay "GND" at 60.97,81.437 h1.52 r90; Top Overlay "VCC" at 63.51,81.437 h1.52 r90; Top Overlay "VRX" at 66.05,81.437 h1.52 r90; Top Overlay "VRY" at 68.59,81.437 h1.52 r90; Top Overlay "SW" at 71.13,81.945 h1.52 r90
XP1: Bottom Overlay "NO COPPER" at 99.442,118.872 h2 r180
XP2: Mechanical 12 "PCB Edge" at 125.65,71.53 h1; Mechanical 12 "PTH2 Slot 2.10 +/- 0.05 X 0.60 +/- 0.05" at 114.41,83.167 h0.5; Mechanical 12 "PTH1 Slot 1.60 +/- 0.05 X 0.60 +/- 0.05" at 114.41,84.068 h0.5